# Altium PCB BMS_Slave_8S V0.1.PcbDoc (part 1 of 2)
Units mil, origin at the board's own origin, x right, y up, seen from the top; angles counter-clockwise.
Board outline 2125.98 x 4185.04 mil, 4 copper layers (Top Layer, L2 (GND), L2 (PWR), Bottom Layer), stack 53.912 mil thick; 165 components, 120 nets, 437 pads, 149 vias.
Unrouted connection lines stored in the file: 123.
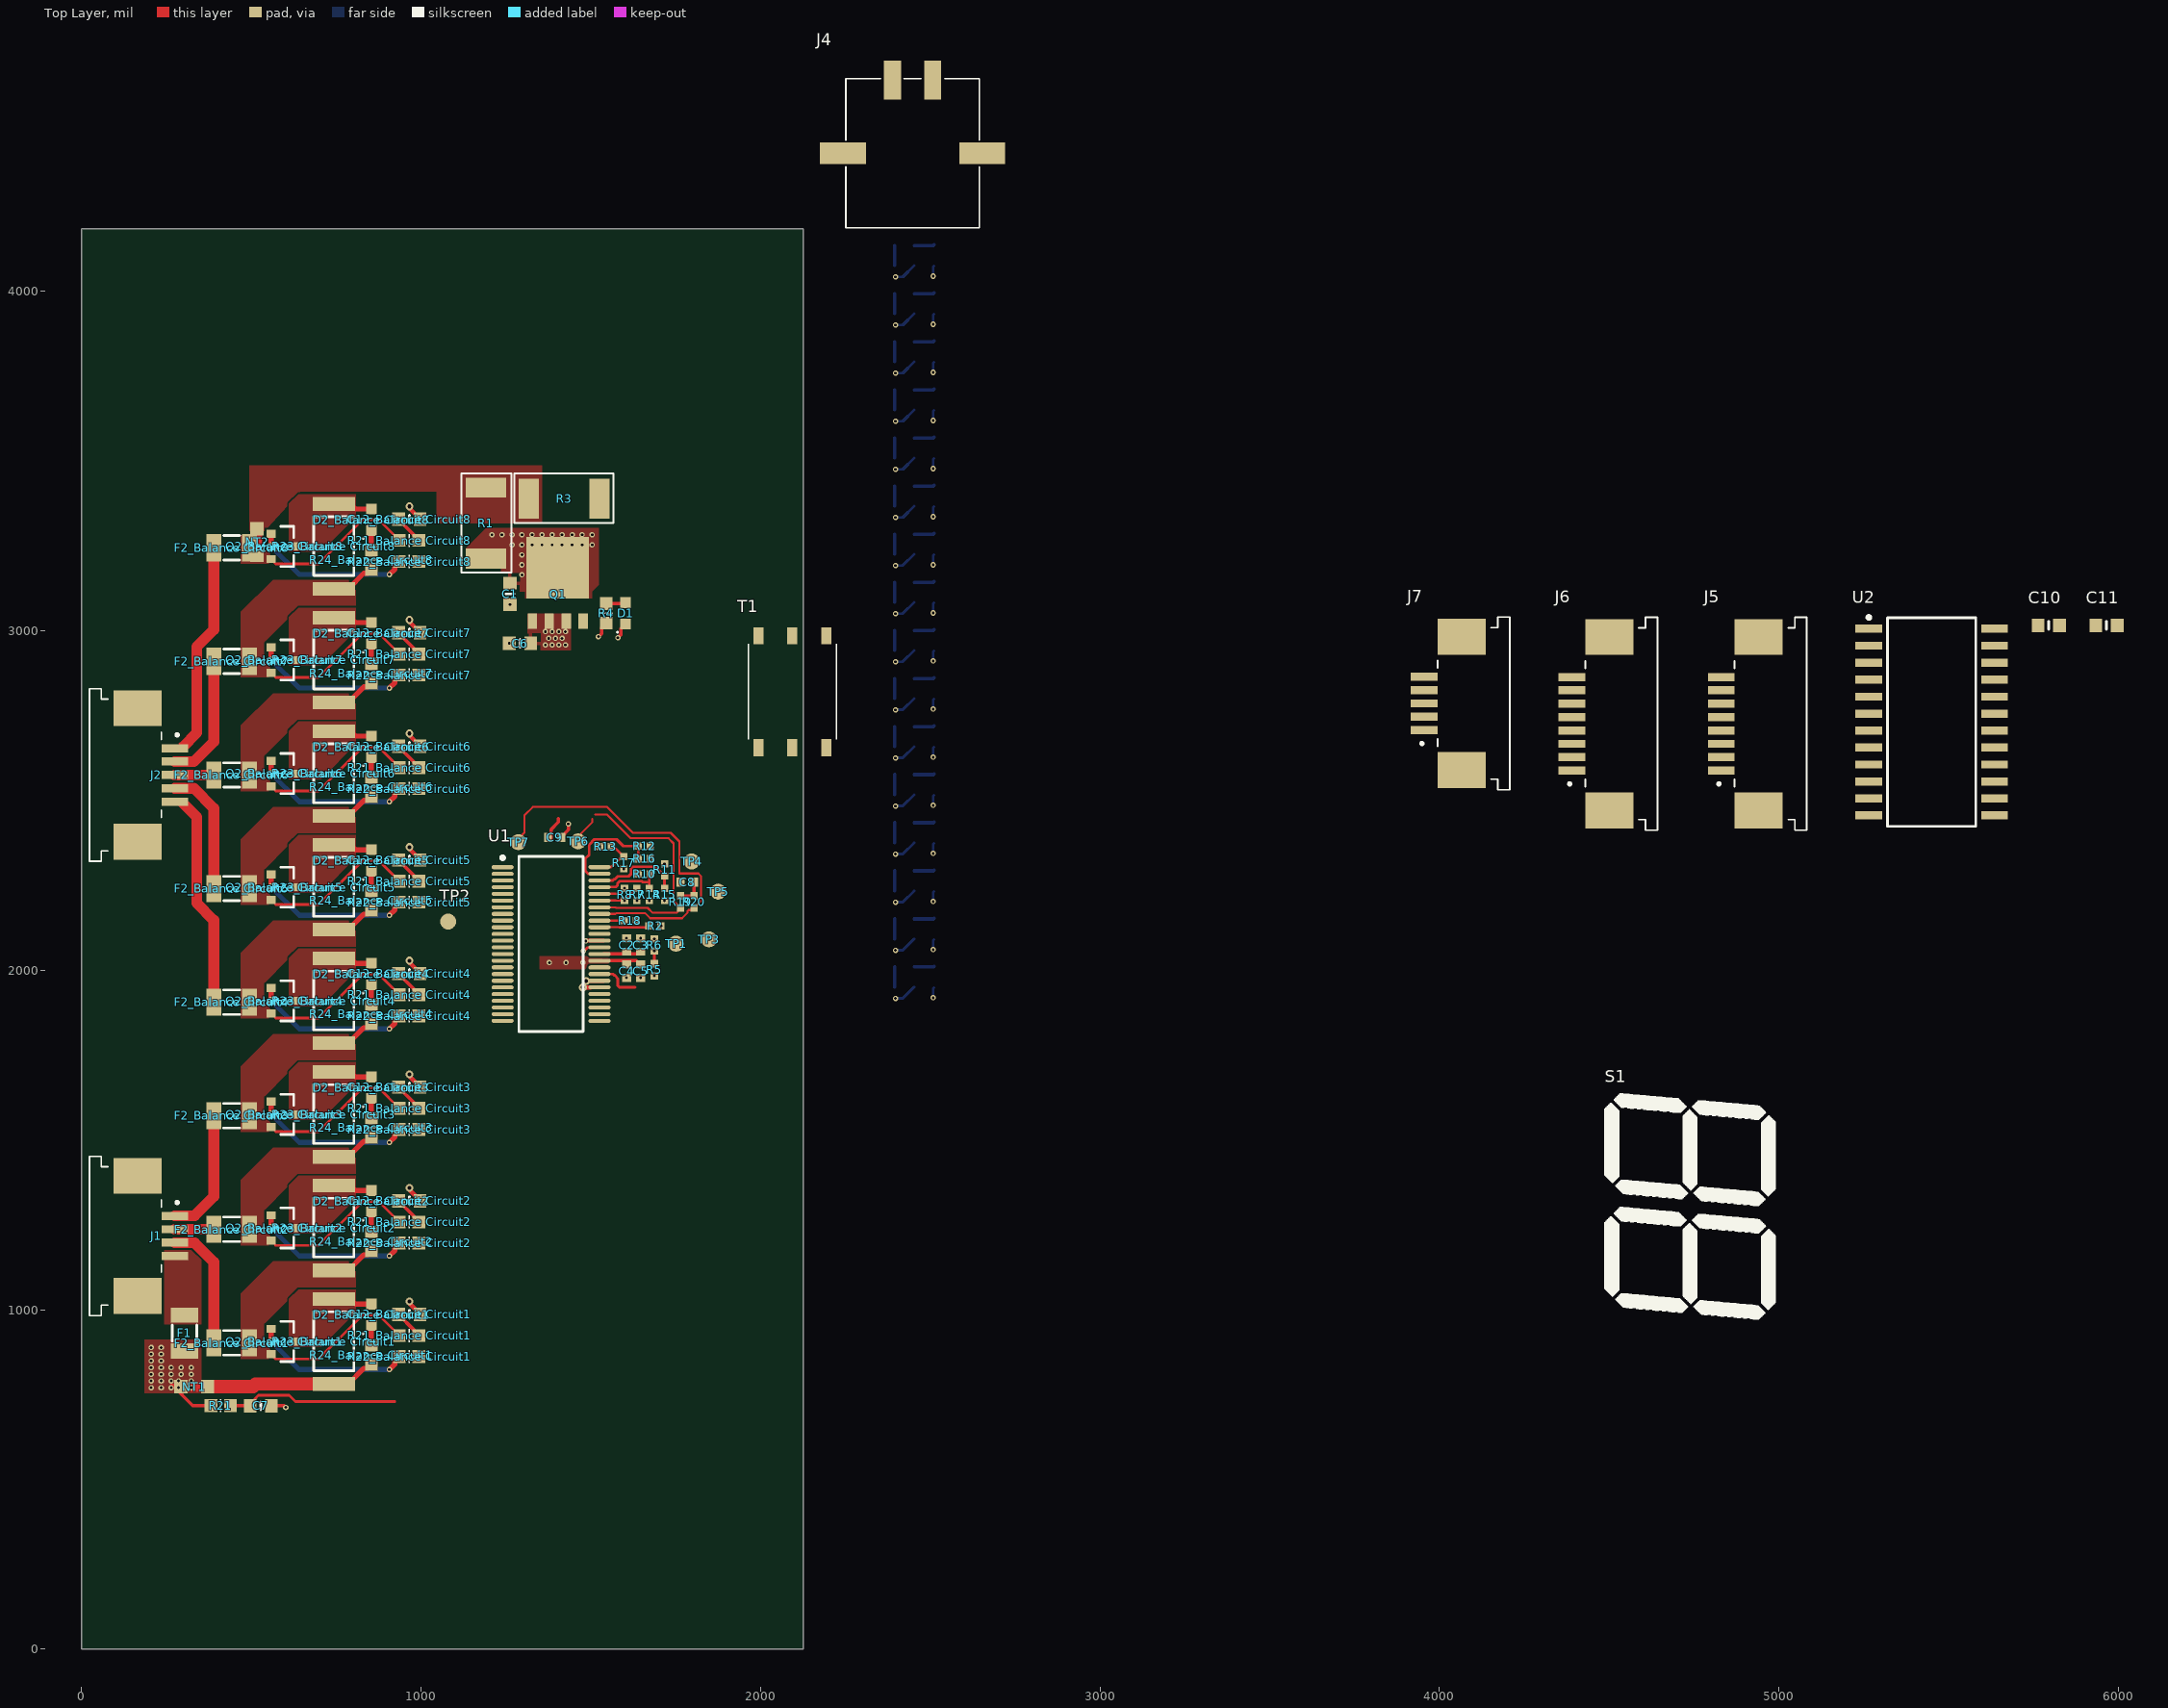
[diagram p0: Top Layer view]
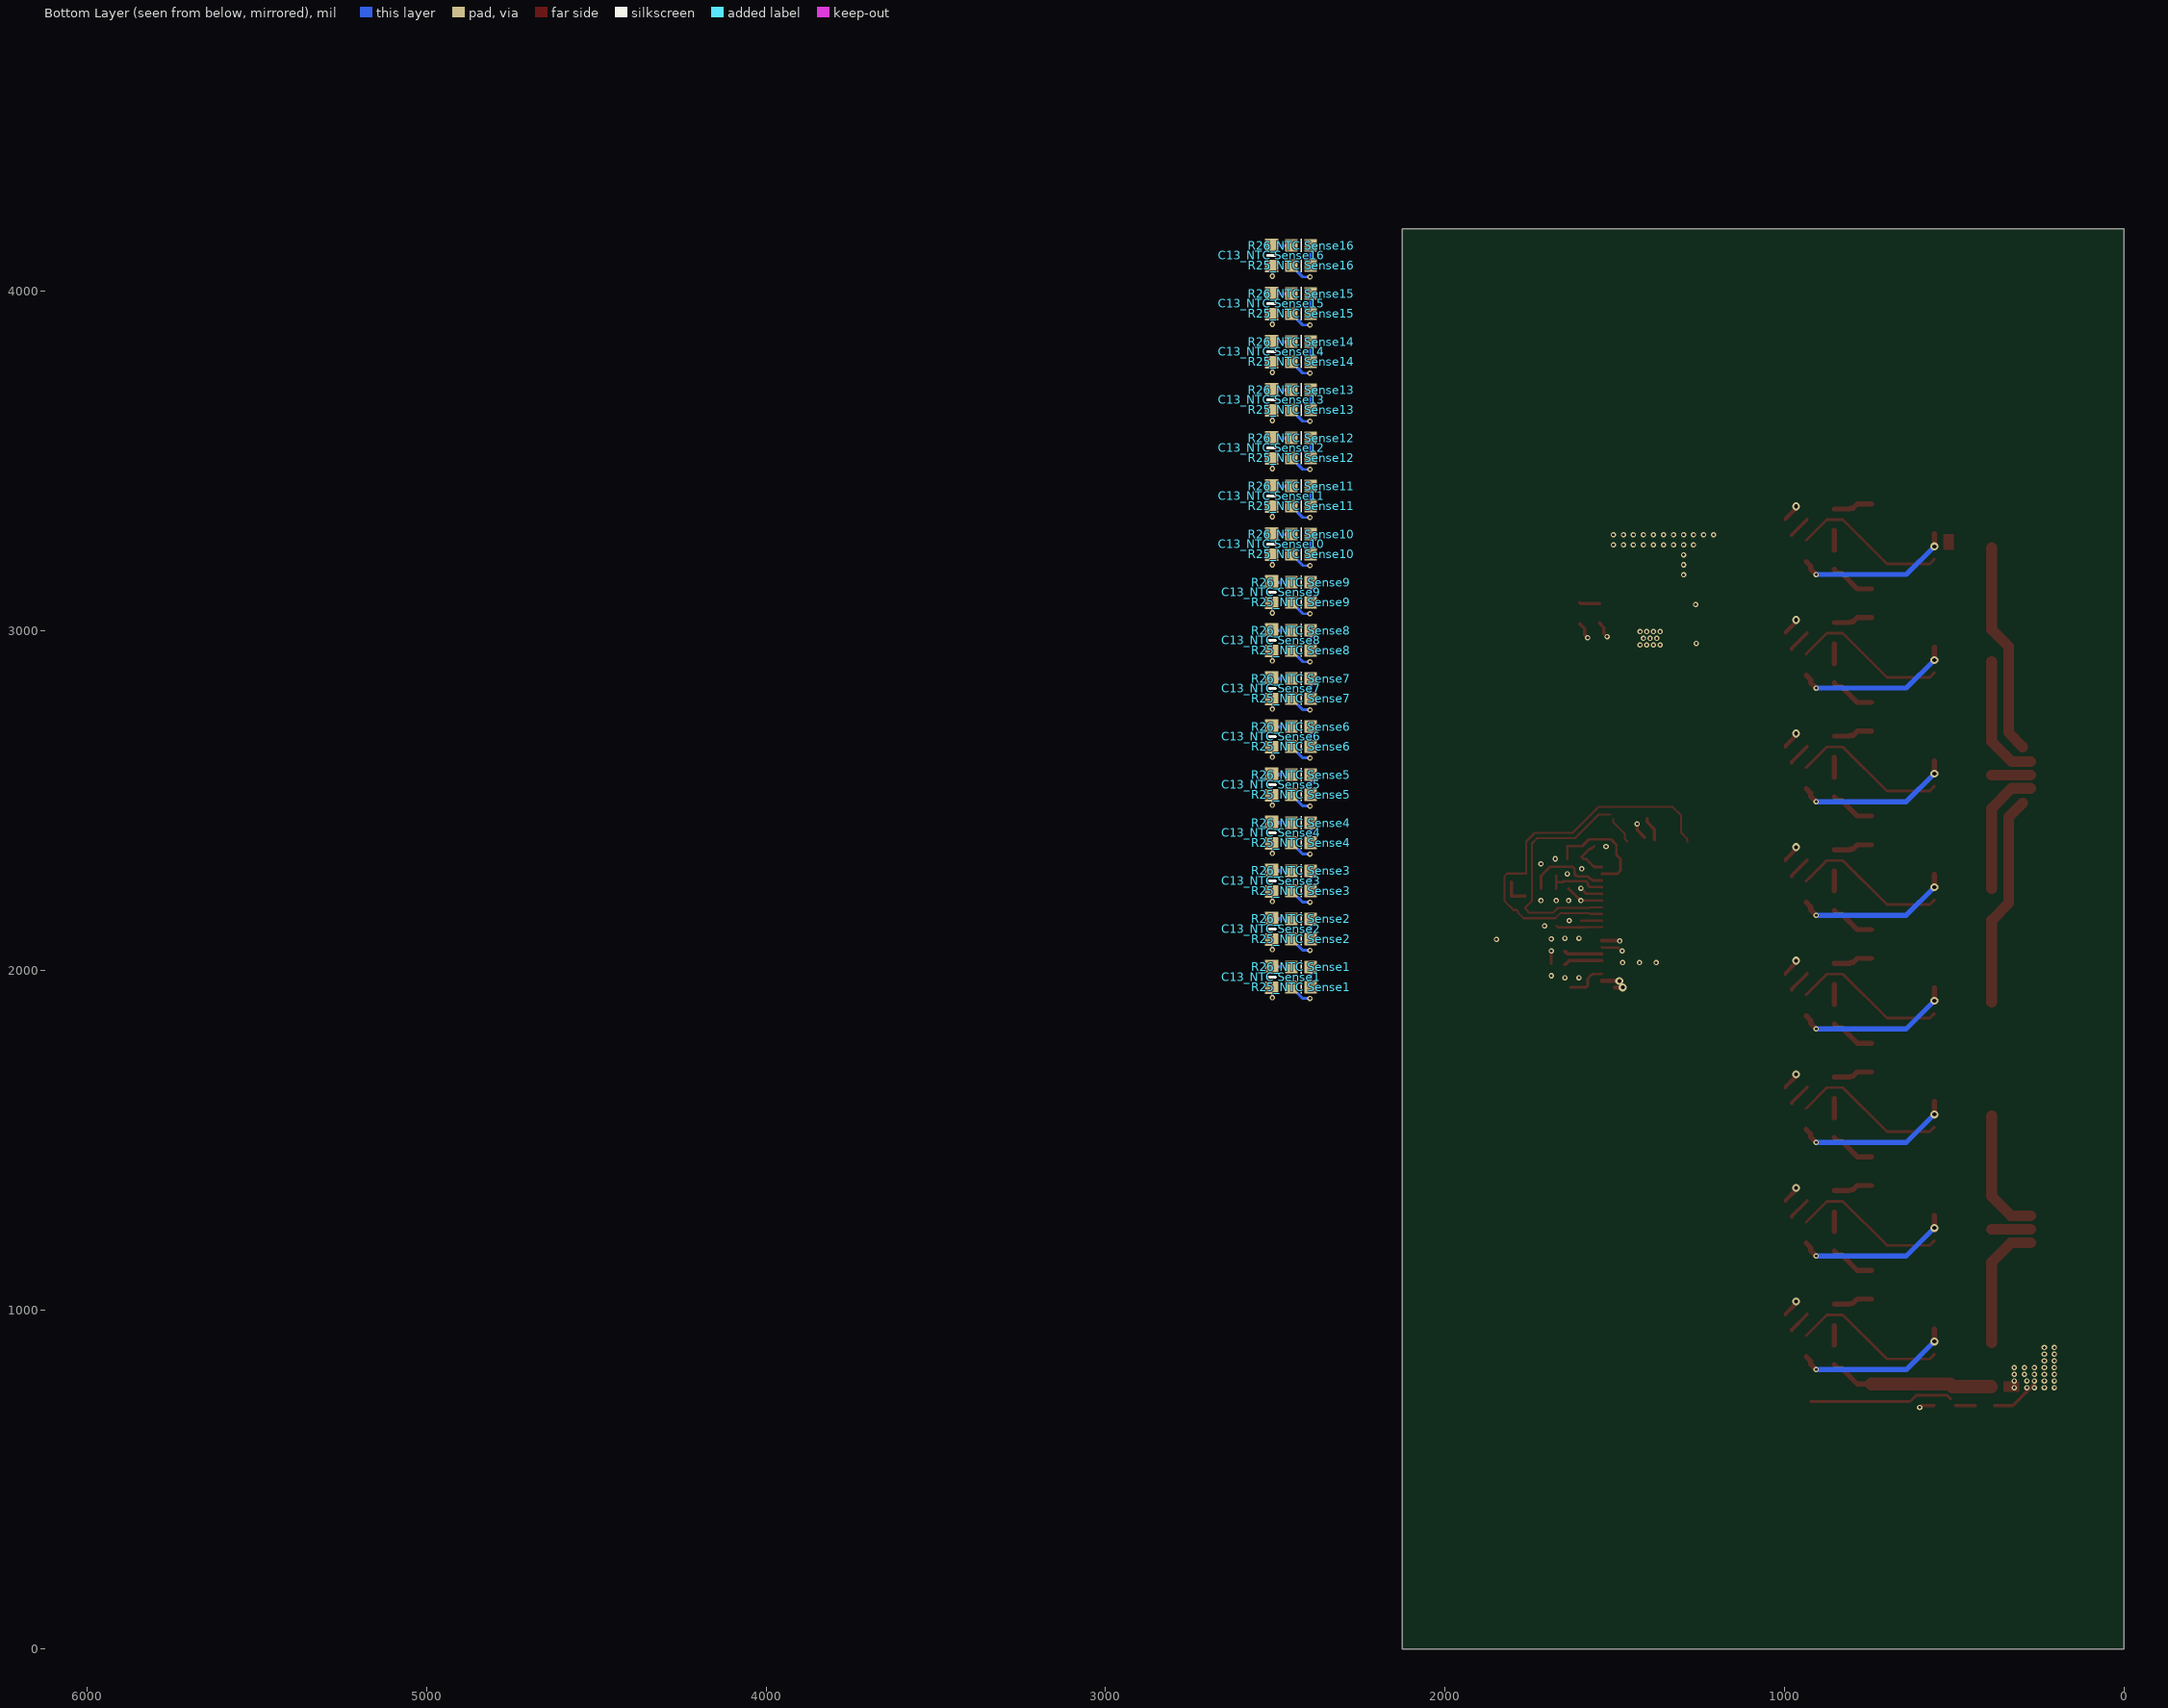
[diagram p1: Bottom Layer view, seen from below]
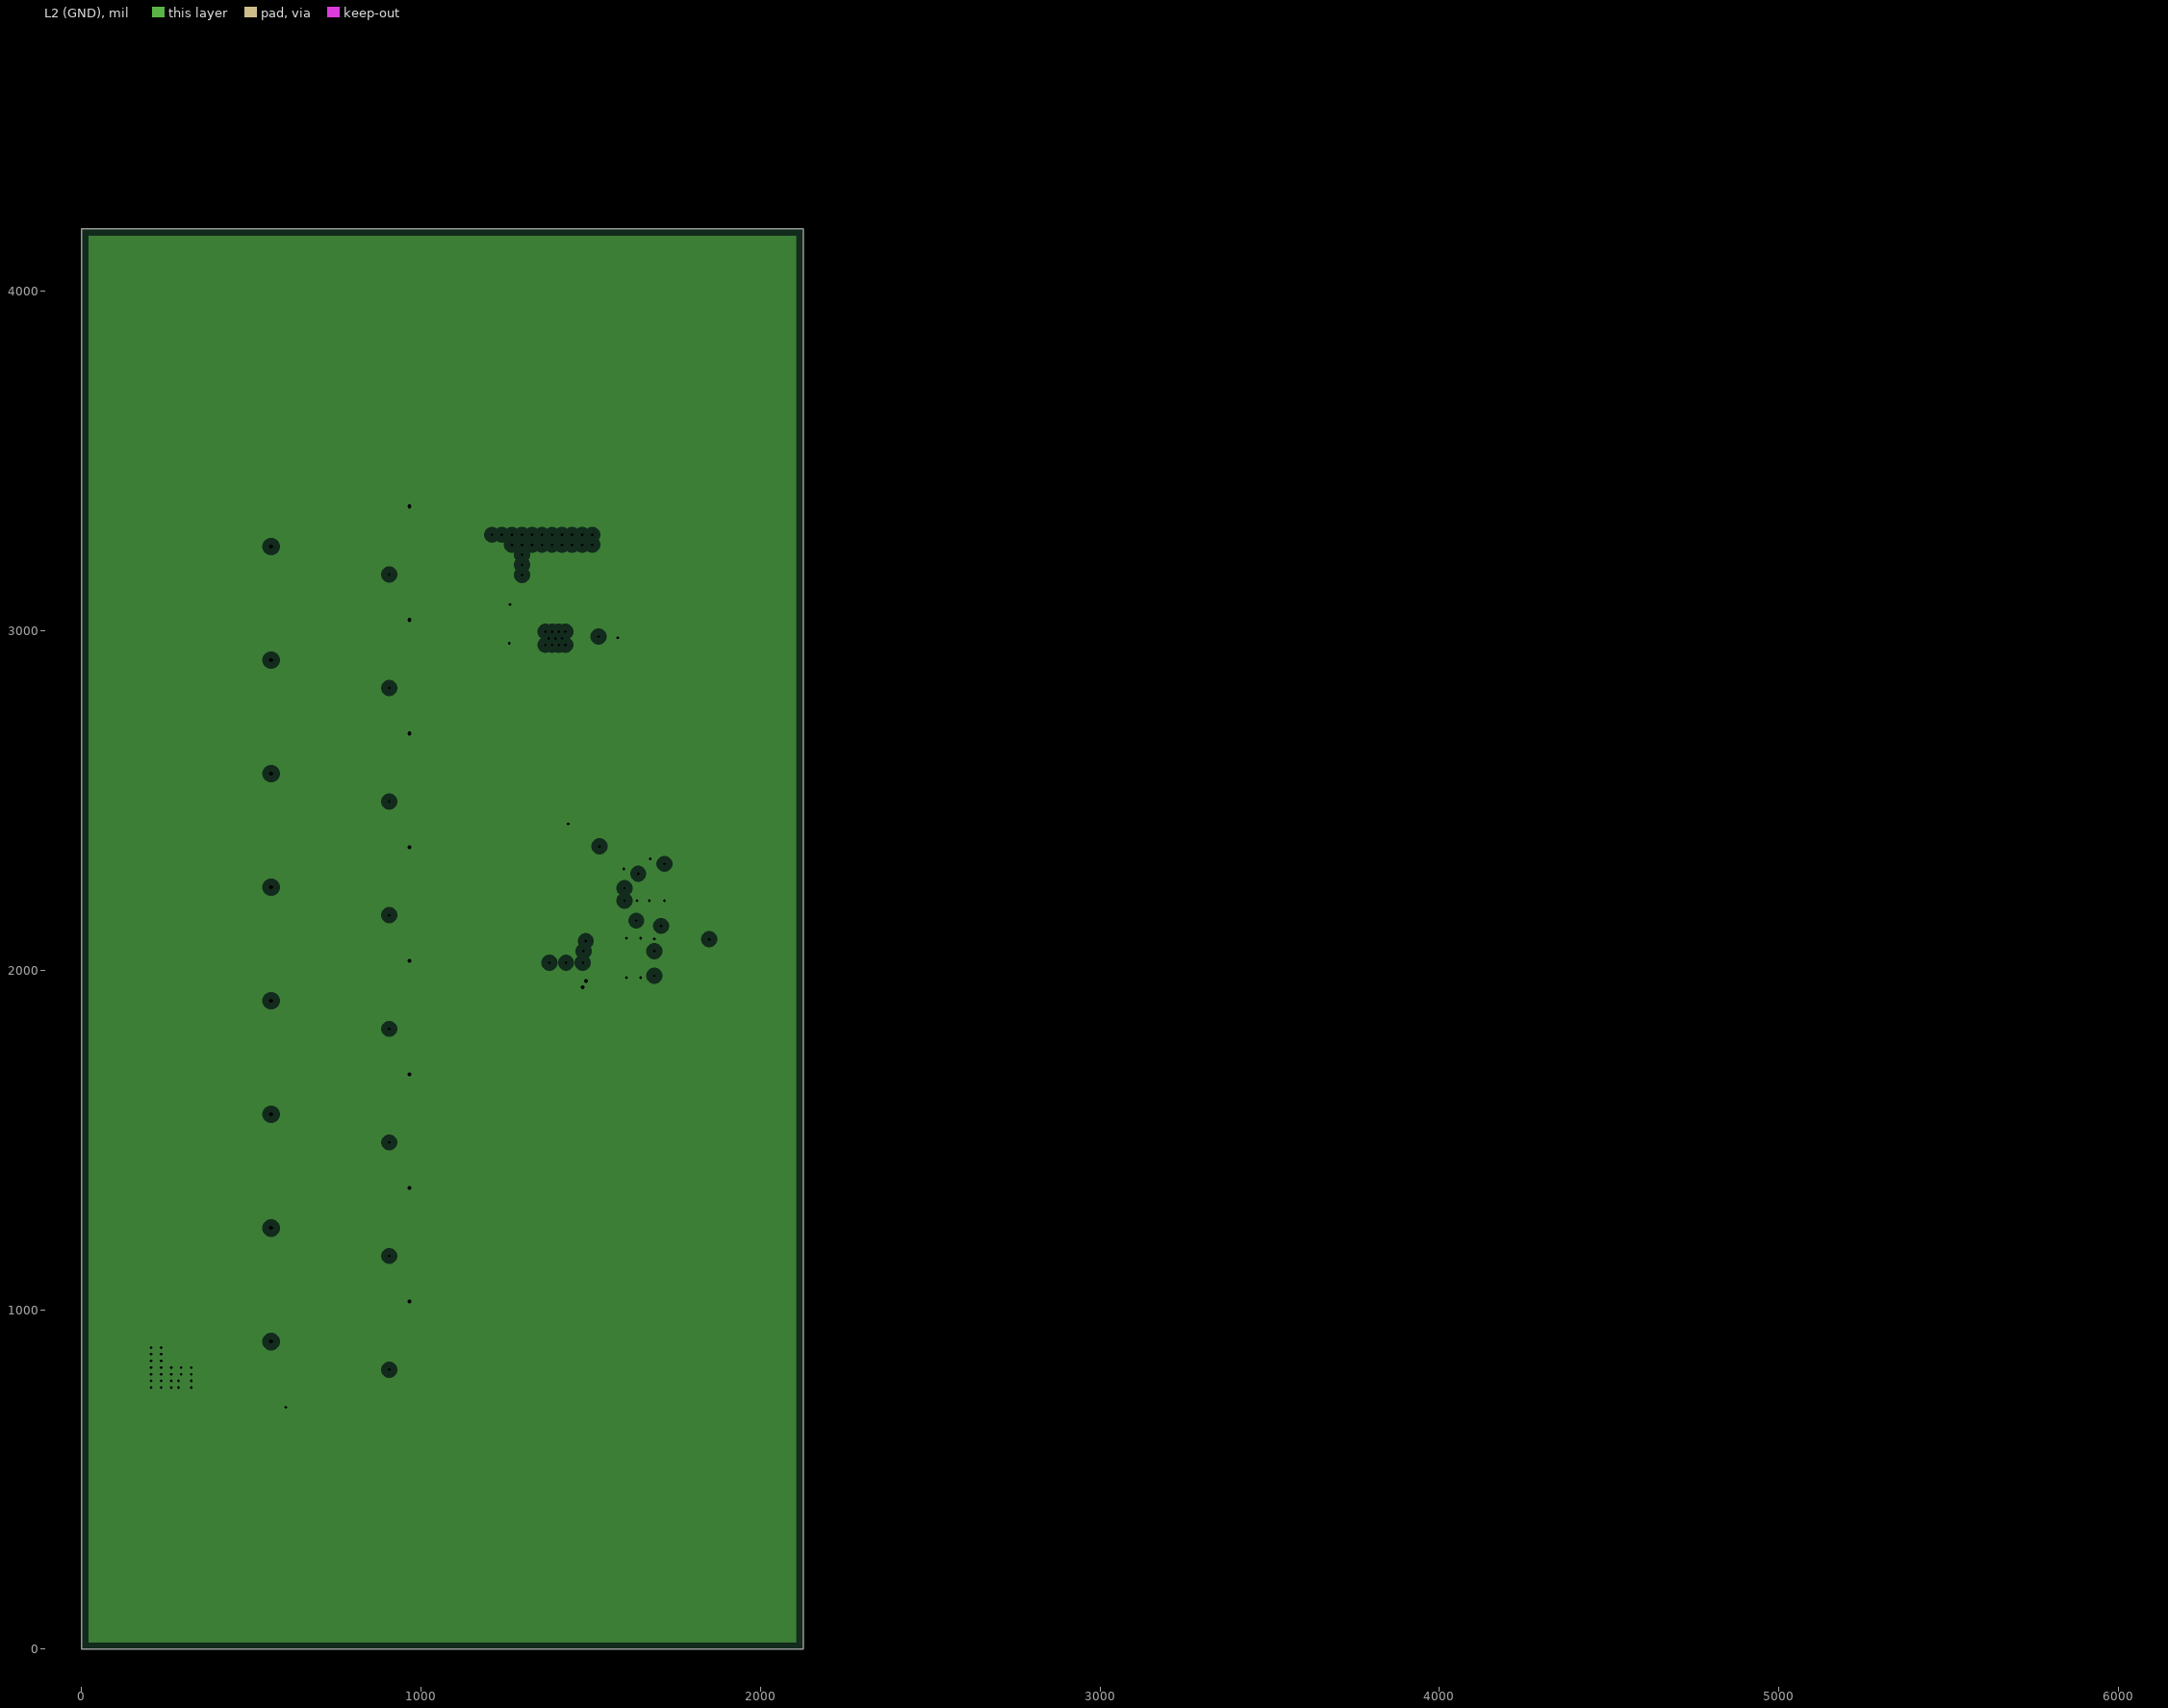
[diagram p2: L2 (GND), clearances drawn from the general rule]
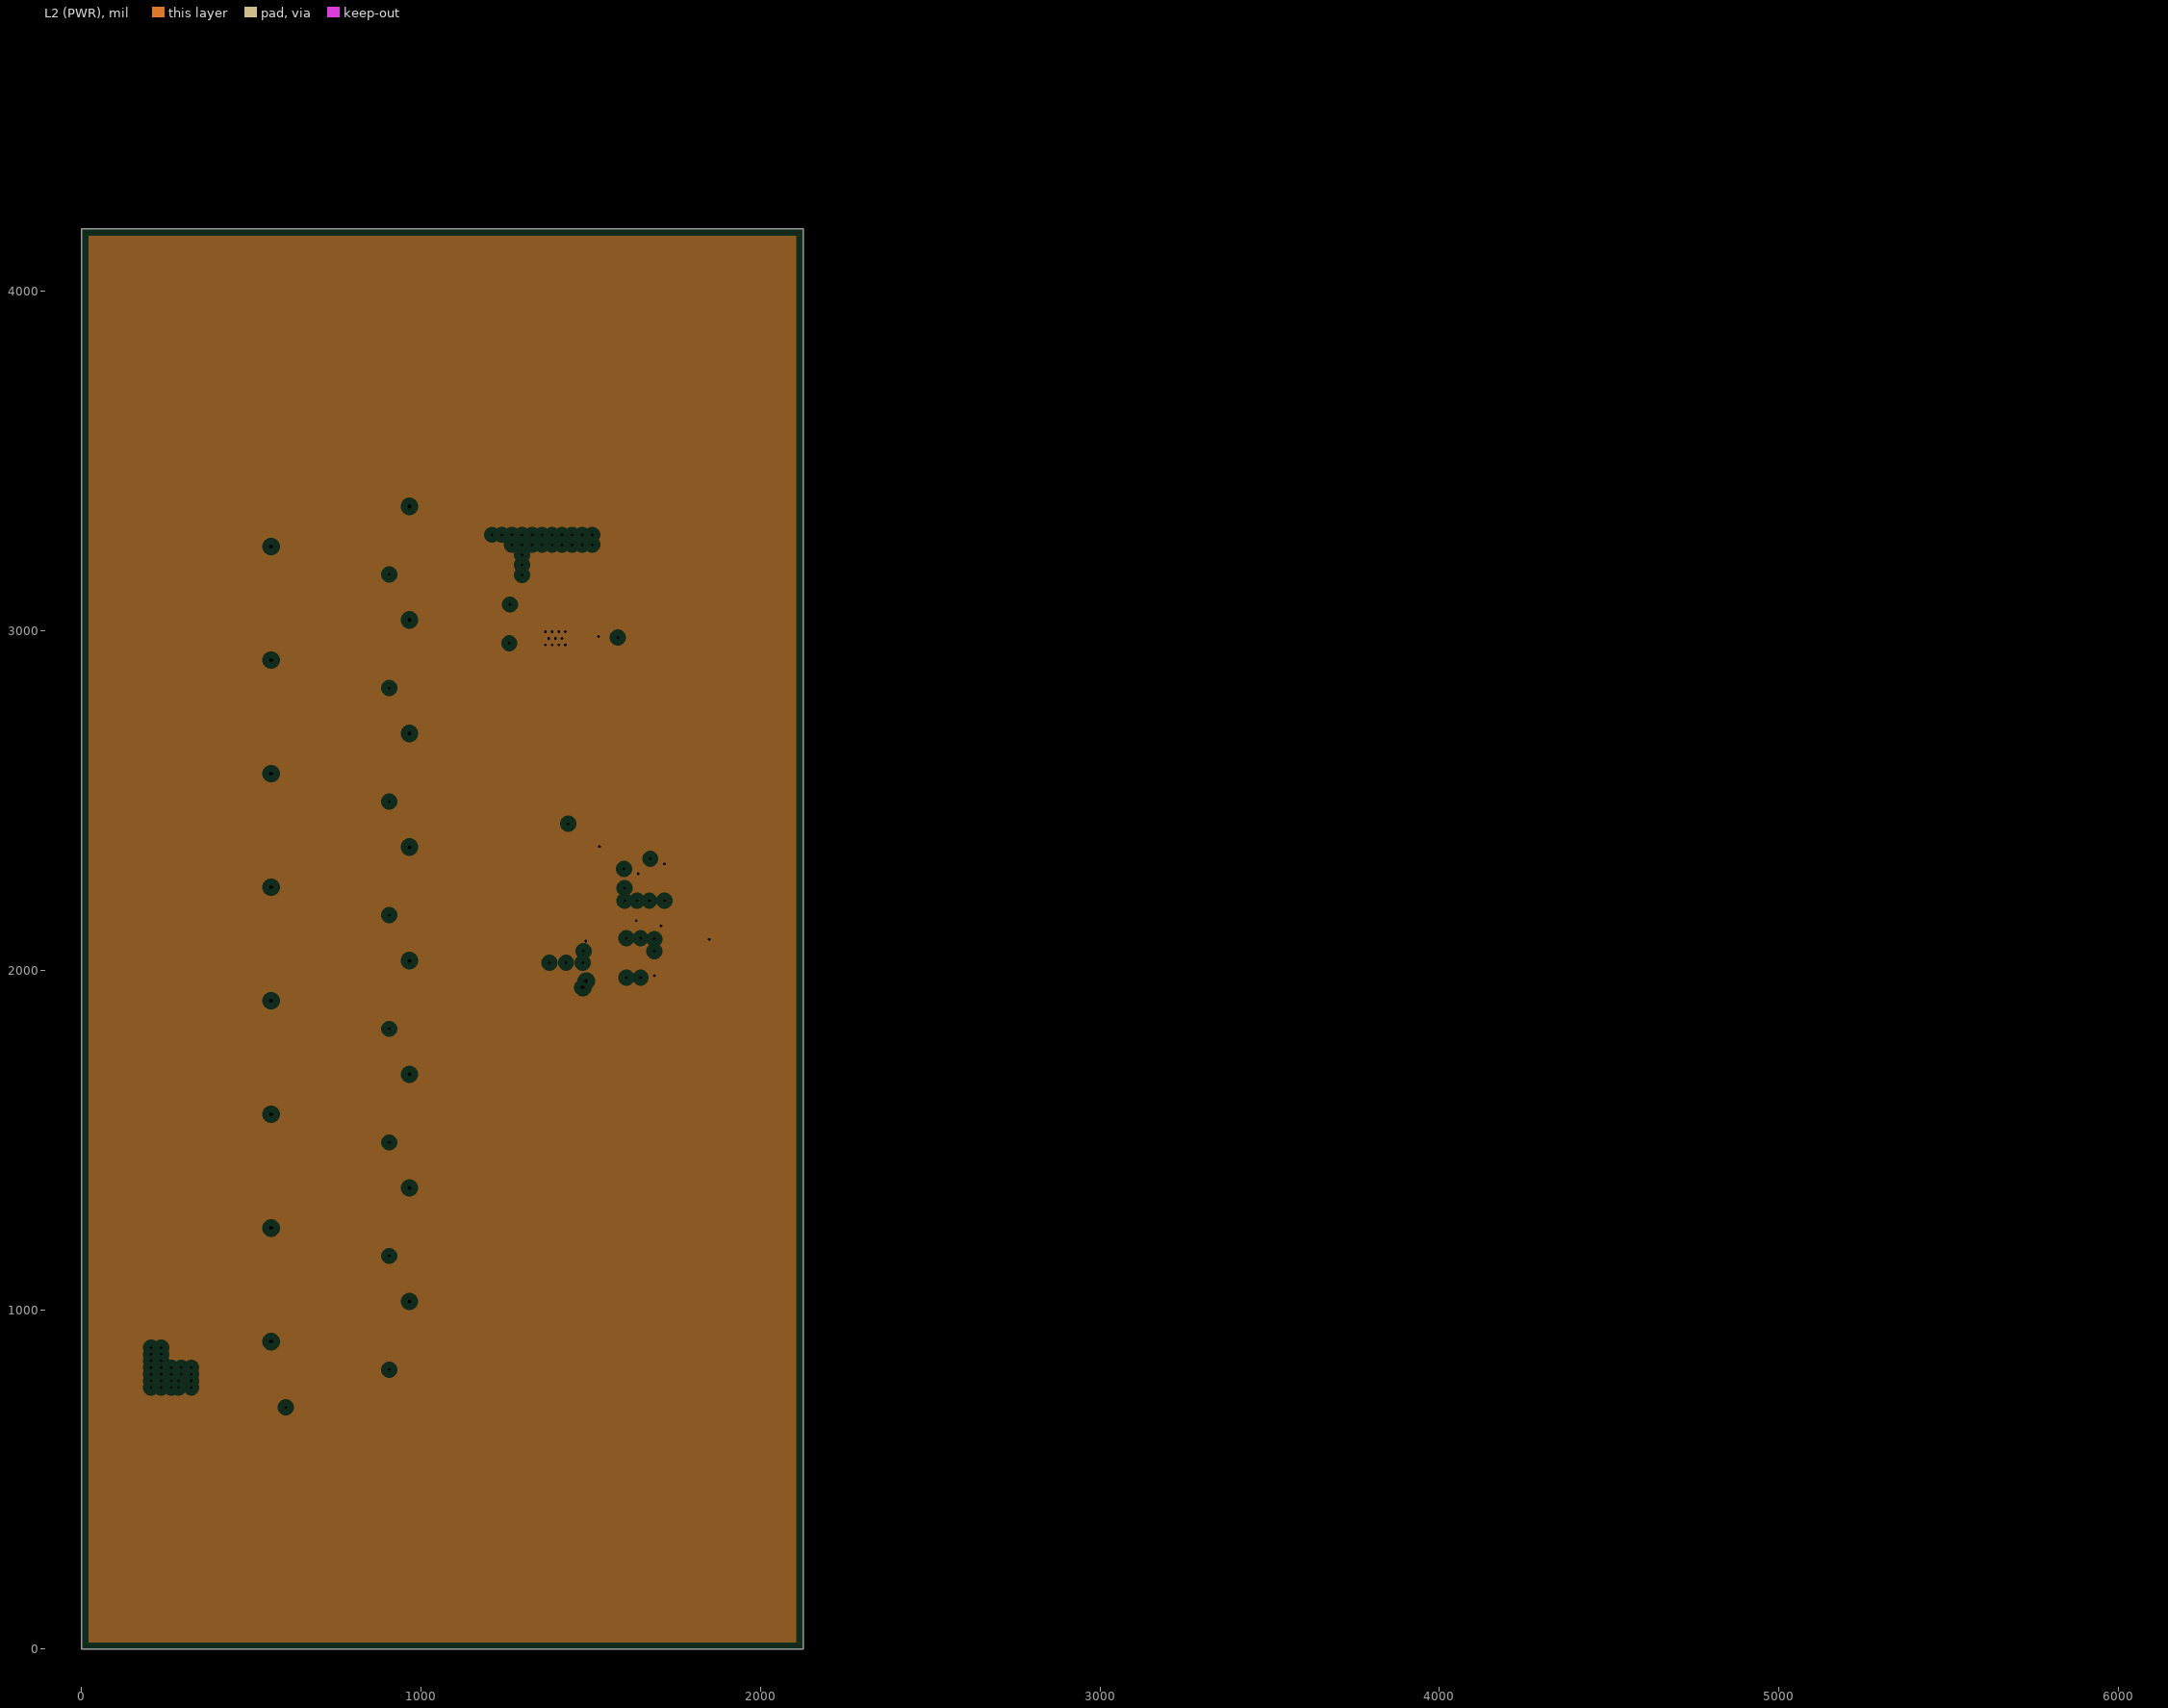
[diagram p3: L2 (PWR), clearances drawn from the general rule]

## Layer stack, top to bottom
Top Solder: solder mask 1, SM-001, Dk 4
Top Layer: signal copper 1.378
Dielectric 1: prepreg 5.1, PP-017, Dk 4.3
Dielectric 2: prepreg 5.1, PP-017, Dk 4.3
L2 (GND): plane copper 1.378, net GND
Dielectric 3: core 28, Core-039, Dk 4.8
L2 (PWR): plane copper 1.378, net 5V0
Dielectric 4: prepreg 5.1, PP-017, Dk 4.3
Dielectric 5: prepreg 5.1, PP-017, Dk 4.3
Bottom Layer: signal copper 1.378
Bottom Solder: solder mask 1, SM-001, Dk 4

## Board outline
0,0 0,4185.04 2125.98,4185.04 2125.98,0

## Design rules (kind name [scope] priority, off if disabled: settings)
BoardOutlineClearance BoardOutlineClearance_Silk [OnLayer('Top Overlay') or OnLayer('Bottom Overlay')] p1: gap=0 ignorepadtopadclearanceinfootprint=FALSE
BoardOutlineClearance [All] p2: gap=19.68 ignorepadtopadclearanceinfootprint=FALSE except(0: Arc-SplitContinuation Track-SplitContinuation SMDPad-SplitContinuation THPad-SplitContinuation Via-SplitContinuation Fill-SplitContinuation Poly-SplitContinuation Region-SplitContinuation Text-SplitContinuation)
Clearance Clearance_NT [HasFootprint('NetTie')] p1: gap=0 ignorepadtopadclearanceinfootprint=FALSE
Clearance [All] p2: gap=6 ignorepadtopadclearanceinfootprint=FALSE
ComponentClearance ComponentClearance-NT [HasFootprint('NetTie')] p1: gap=0 collisioncheckmode=3 verticalgap=0 showdistances=FALSE
ComponentClearance [All] p2: gap=10 collisioncheckmode=3 verticalgap=10 showdistances=FALSE
DiffPairsRouting [InDifferentialPairClass('isoSPI')] p1: maxlimit=10 minlimit=10 mostfreqgap=10 toplayer_minwidth=6 toplayer_maxwidth=6 toplayer_prefwidth=6 bottomlayer_minwidth=6 bottomlayer_maxwidth=6 bottomlayer_prefwidth=6 impedanceprofiledriven=TRUE maxuncoupledlength=1968.5
HoleSize [All] p1: absolutevalues=TRUE maxlimit=248.03 minlimit=7.87 maxpercent=80.000 minpercent=20.000
HoleToHoleClearance [All] p1: gap=11 allowstackedmicrovias=TRUE
MinimumAnnularRing [All] p1: minimumring=6
MinimumSolderMaskSliver [All] p1: minsoldermaskwidth=4
PlaneClearance [All] p1: clearance=20
PlaneConnect [All] p1: planeconnectstyle=Direct reliefexpansion=20 reliefentries=4 reliefconductorwidth=10 reliefairgap=10
PolygonConnect PolygonConnect-Passive [HasFootprint('C-0402') or HasFootprint('R_0402') or HasFootprint('C_0603') or HasFootprint('R-0603')] p1: thpad.connectstyle=Direct thpad.reliefconductorwidth=10 thpad.reliefentries=4 thpad.polygonreliefangle="90 Angle" thpad.airgapwidth=10 smdpad.connectstyle=Relief smdpad.reliefconductorwidth=10 smdpad.reliefentries=4 smdpad.polygonreliefangle="90 Angle" smdpad.airgapwidth=10 via.connectstyle=Direct via.reliefconductorwidth=10 via.reliefentries=4 via.polygonreliefangle="90 Angle" via.airgapwidth=10
PolygonConnect "Power Connect" [All] p2: connectstyle=Direct reliefconductorwidth=10 reliefentries=4 polygonreliefangle="90 Angle" airgapwidth=10
PolygonConnect [All] p3: thpad.connectstyle=Direct thpad.reliefconductorwidth=10 thpad.reliefentries=4 thpad.polygonreliefangle="90 Angle" thpad.airgapwidth=10 smdpad.connectstyle=Relief smdpad.reliefconductorwidth=10 smdpad.reliefentries=4 smdpad.polygonreliefangle="90 Angle" smdpad.airgapwidth=10 via.connectstyle=Direct via.reliefconductorwidth=10 via.reliefentries=4 via.polygonreliefangle="90 Angle" via.airgapwidth=10
RoomDefinition "Balance Circuit2" [InComponentClass('Balance Circuit2')] p1: confinementstyle=ConfineIn formatcopy=TRUE lockcomponents=FALSE outline 341.54,1073.82 1035.43,1073.82 1035.43,1408.46 341.54,1408.46
RoomDefinition "Balance Circuit1" [InComponentClass('Balance Circuit1')] p2: confinementstyle=ConfineIn formatcopy=TRUE lockcomponents=FALSE outline 341.54,739.17 1035.43,739.17 1035.43,1073.82 341.54,1073.82
RoomDefinition "Balance Circuit3" [InComponentClass('Balance Circuit3')] p3: confinementstyle=ConfineIn formatcopy=TRUE lockcomponents=FALSE outline 341.54,1408.46 1035.43,1408.46 1035.43,1743.11 341.54,1743.11
RoomDefinition "Balance Circuit4" [InComponentClass('Balance Circuit4')] p4: confinementstyle=ConfineIn formatcopy=TRUE lockcomponents=FALSE outline 341.54,1743.11 1035.43,1743.11 1035.43,2077.76 341.54,2077.76
RoomDefinition "Balance Circuit5" [InComponentClass('Balance Circuit5')] p5: confinementstyle=ConfineIn formatcopy=TRUE lockcomponents=FALSE outline 341.54,2077.76 1035.43,2077.76 1035.43,2412.4 341.54,2412.4
RoomDefinition "Balance Circuit6" [InComponentClass('Balance Circuit6')] p6: confinementstyle=ConfineIn formatcopy=TRUE lockcomponents=FALSE outline 341.54,2412.4 1035.43,2412.4 1035.43,2747.05 341.54,2747.05
RoomDefinition "Balance Circuit7" [InComponentClass('Balance Circuit7')] p7: confinementstyle=ConfineIn formatcopy=TRUE lockcomponents=FALSE outline 341.54,2747.05 1035.43,2747.05 1035.43,3081.69 341.54,3081.69
RoomDefinition "Balance Circuit8" [InComponentClass('Balance Circuit8')] p8: confinementstyle=ConfineIn formatcopy=TRUE lockcomponents=FALSE outline 341.54,3081.69 1035.43,3081.69 1035.43,3416.34 341.54,3416.34
RoomDefinition "U_Temperature Sensing" [InComponentClass('U_Temperature Sensing')] p9: confinementstyle=ConfineIn formatcopy=TRUE lockcomponents=FALSE outline 3894.68,2391.73 6036.42,2391.73 6036.42,3062.01 3894.68,3062.01
RoomDefinition "NTC Sense16" [InComponentClass('NTC Sense16')] p10: confinementstyle=ConfineIn formatcopy=TRUE lockcomponents=FALSE outline 2355.31,4035.43 2552.17,4035.43 2552.17,4177.17 2355.31,4177.17
RoomDefinition "NTC Sense15" [InComponentClass('NTC Sense15')] p11: confinementstyle=ConfineIn formatcopy=TRUE lockcomponents=FALSE outline 2355.31,3893.7 2552.17,3893.7 2552.17,4035.43 2355.31,4035.43
RoomDefinition "NTC Sense14" [InComponentClass('NTC Sense14')] p12: confinementstyle=ConfineIn formatcopy=TRUE lockcomponents=FALSE outline 2355.31,3751.97 2552.17,3751.97 2552.17,3893.7 2355.31,3893.7
RoomDefinition "NTC Sense13" [InComponentClass('NTC Sense13')] p13: confinementstyle=ConfineIn formatcopy=TRUE lockcomponents=FALSE outline 2355.31,3610.24 2552.17,3610.24 2552.17,3751.97 2355.31,3751.97
RoomDefinition "NTC Sense12" [InComponentClass('NTC Sense12')] p14: confinementstyle=ConfineIn formatcopy=TRUE lockcomponents=FALSE outline 2355.31,3468.5 2552.17,3468.5 2552.17,3610.24 2355.31,3610.24
RoomDefinition "NTC Sense11" [InComponentClass('NTC Sense11')] p15: confinementstyle=ConfineIn formatcopy=TRUE lockcomponents=FALSE outline 2355.31,3326.77 2552.17,3326.77 2552.17,3468.5 2355.31,3468.5
RoomDefinition "NTC Sense10" [InComponentClass('NTC Sense10')] p16: confinementstyle=ConfineIn formatcopy=TRUE lockcomponents=FALSE outline 2355.31,3185.04 2552.17,3185.04 2552.17,3326.77 2355.31,3326.77
RoomDefinition "NTC Sense9" [InComponentClass('NTC Sense9')] p17: confinementstyle=ConfineIn formatcopy=TRUE lockcomponents=FALSE outline 2355.31,3043.31 2552.17,3043.31 2552.17,3185.04 2355.31,3185.04
RoomDefinition "NTC Sense8" [InComponentClass('NTC Sense8')] p18: confinementstyle=ConfineIn formatcopy=TRUE lockcomponents=FALSE outline 2355.31,2901.57 2552.17,2901.57 2552.17,3043.31 2355.31,3043.31
RoomDefinition "NTC Sense7" [InComponentClass('NTC Sense7')] p19: confinementstyle=ConfineIn formatcopy=TRUE lockcomponents=FALSE outline 2355.31,2759.84 2552.17,2759.84 2552.17,2901.57 2355.31,2901.57
RoomDefinition "NTC Sense6" [InComponentClass('NTC Sense6')] p20: confinementstyle=ConfineIn formatcopy=TRUE lockcomponents=FALSE outline 2355.31,2618.11 2552.17,2618.11 2552.17,2759.84 2355.31,2759.84
RoomDefinition "NTC Sense5" [InComponentClass('NTC Sense5')] p21: confinementstyle=ConfineIn formatcopy=TRUE lockcomponents=FALSE outline 2355.31,2476.38 2552.17,2476.38 2552.17,2618.11 2355.31,2618.11
RoomDefinition "NTC Sense4" [InComponentClass('NTC Sense4')] p22: confinementstyle=ConfineIn formatcopy=TRUE lockcomponents=FALSE outline 2355.31,2334.65 2552.17,2334.65 2552.17,2476.38 2355.31,2476.38
RoomDefinition "NTC Sense3" [InComponentClass('NTC Sense3')] p23: confinementstyle=ConfineIn formatcopy=TRUE lockcomponents=FALSE outline 2355.31,2192.91 2552.17,2192.91 2552.17,2334.65 2355.31,2334.65
RoomDefinition "NTC Sense2" [InComponentClass('NTC Sense2')] p24: confinementstyle=ConfineIn formatcopy=TRUE lockcomponents=FALSE outline 2355.31,2051.18 2552.17,2051.18 2552.17,2192.91 2355.31,2192.91
RoomDefinition "NTC Sense1" [InComponentClass('NTC Sense1')] p25: confinementstyle=ConfineIn formatcopy=TRUE lockcomponents=FALSE outline 2355.31,1909.45 2552.17,1909.45 2552.17,2051.18 2355.31,2051.18
RoutingVias [All] p1: holewidth=11.81 width=23.62 viastyle="Through Hole" minholewidth=7.87 minwidth=15.75 maxholewidth=15.75 maxwidth=27.56
ShortCircuit ShortCircuit_NT [HasFootprint('NetTie')] p1: allowed=TRUE
ShortCircuit [All] p2: allowed=FALSE
SilkToSilkClearance [All] p1: silktosilkclearance=0
SilkToSolderMaskClearance [IsPad] p1: minsilkscreentomaskgap=6 clearancetoexposedcopper=TRUE
SolderMaskExpansion SolderMaskExpansion_NT [HasFootprint('NetTie')] p1: expansion=4 istentingtop=TRUE
SolderMaskExpansion SolderMaskExpansion_Via [isvia] p2: expansion=4 istentingtop=TRUE
SolderMaskExpansion [All] p3: expansion=2 istentingtop=FALSE
Width [All] p1: maxlimit=100 minlimit=6 preferedwidth=8
20 further rules are at their usual default settings.

## Classes and differential pairs
channel class "NTC Sense V0.1": "NTC Sense1" "NTC Sense2" "NTC Sense3" "NTC Sense4" "NTC Sense5" "NTC Sense6" "NTC Sense7" "NTC Sense8" "NTC Sense9" "NTC Sense10" "NTC Sense11" "NTC Sense12" "NTC Sense13" "NTC Sense14" "NTC Sense15" "NTC Sense16"
channel class "Balance V0.1": "Balance Circuit1" "Balance Circuit2" "Balance Circuit3" "Balance Circuit4" "Balance Circuit5" "Balance Circuit6" "Balance Circuit7" "Balance Circuit8"
differential pair class isoSPI: isoSPI. PORTA
net class Vc[8..1]: Vc1 Vc2 Vc3 Vc4 Vc5 Vc6 Vc7 Vc8
net class T[12..1]: B2 B3 B4 B5 B6 B7 B8 T8 T9 T10 T11 T12
net class S[8..1]: S1 S2 S3 S4 S5 S6 S7 S8
net class Out[16..1]: Out1 Out2 Out3 Out4 Out5 Out6 Out7 Out8 Out9 Out10 Out11 Out12 Out13 Out14 Out15 Out16
net class NTC[16..1]: NTC1 NTC2 NTC3 NTC4 NTC5 NTC6 NTC7 NTC8 NTC9 NTC10 NTC11 NTC12 NTC13 NTC14 NTC15 NTC16
net class C[8..1]: C1 C2 C3 C4 C5 C6 C7 C8
net class BalanceNetClass: B1 B2 B3 B4 B5 B6 B7 B8 "NetD2_Balance Circuit1_2" "NetD2_Balance Circuit2_2" "NetD2_Balance Circuit3_2" "NetD2_Balance Circuit4_2" "NetD2_Balance Circuit5_2" "NetD2_Balance Circuit6_2" "NetD2_Balance Circuit7_2" "NetD2_Balance Circuit8_2" T8
net class B[12..1]: B1 B2 B3 B4 B5 B6 B7 B8 B9 B10 B11 B12
component class "U_Temperature Sensing": C10 C11 J5 J6 J7 U2
component class U_IsoSPI: C8 C9 J4 R19 R20 T1
component class "U_Cell Monitor": C1 C2 C3 C4 C5 C6 C7 D1 F1 J1 J2 NT1 NT2 Q1 R1 R2 R3 R4 R5 R6 R7 R8 R10 R11 R12 R13 R14 R15 R16 R17 R18 S1 TP1 TP2 TP3 TP4 TP5 TP6 TP7 U1
component class "NTC Sense16": "C13_NTC Sense16" "R25_NTC Sense16" "R26_NTC Sense16"
component class "NTC Sense15": "C13_NTC Sense15" "R25_NTC Sense15" "R26_NTC Sense15"
component class "NTC Sense14": "C13_NTC Sense14" "R25_NTC Sense14" "R26_NTC Sense14"
component class "NTC Sense13": "C13_NTC Sense13" "R25_NTC Sense13" "R26_NTC Sense13"
component class "NTC Sense12": "C13_NTC Sense12" "R25_NTC Sense12" "R26_NTC Sense12"
component class "NTC Sense11": "C13_NTC Sense11" "R25_NTC Sense11" "R26_NTC Sense11"
component class "NTC Sense10": "C13_NTC Sense10" "R25_NTC Sense10" "R26_NTC Sense10"
component class "NTC Sense9": "C13_NTC Sense9" "R25_NTC Sense9" "R26_NTC Sense9"
component class "NTC Sense8": "C13_NTC Sense8" "R25_NTC Sense8" "R26_NTC Sense8"
component class "NTC Sense7": "C13_NTC Sense7" "R25_NTC Sense7" "R26_NTC Sense7"
component class "NTC Sense6": "C13_NTC Sense6" "R25_NTC Sense6" "R26_NTC Sense6"
component class "NTC Sense5": "C13_NTC Sense5" "R25_NTC Sense5" "R26_NTC Sense5"
component class "NTC Sense4": "C13_NTC Sense4" "R25_NTC Sense4" "R26_NTC Sense4"
component class "NTC Sense3": "C13_NTC Sense3" "R25_NTC Sense3" "R26_NTC Sense3"
component class "NTC Sense2": "C13_NTC Sense2" "R25_NTC Sense2" "R26_NTC Sense2"
component class "NTC Sense1": "C13_NTC Sense1" "R25_NTC Sense1" "R26_NTC Sense1"
component class "Balance Circuit8": "C12_Balance Circuit8" "D2_Balance Circuit8" "F2_Balance Circuit8" "Q2_Balance Circuit8" "R21_Balance Circuit8" "R22_Balance Circuit8" "R23_Balance Circuit8" "R24_Balance Circuit8"
component class "Balance Circuit7": "C12_Balance Circuit7" "D2_Balance Circuit7" "F2_Balance Circuit7" "Q2_Balance Circuit7" "R21_Balance Circuit7" "R22_Balance Circuit7" "R23_Balance Circuit7" "R24_Balance Circuit7"
component class "Balance Circuit6": "C12_Balance Circuit6" "D2_Balance Circuit6" "F2_Balance Circuit6" "Q2_Balance Circuit6" "R21_Balance Circuit6" "R22_Balance Circuit6" "R23_Balance Circuit6" "R24_Balance Circuit6"
component class "Balance Circuit5": "C12_Balance Circuit5" "D2_Balance Circuit5" "F2_Balance Circuit5" "Q2_Balance Circuit5" "R21_Balance Circuit5" "R22_Balance Circuit5" "R23_Balance Circuit5" "R24_Balance Circuit5"
component class "Balance Circuit4": "C12_Balance Circuit4" "D2_Balance Circuit4" "F2_Balance Circuit4" "Q2_Balance Circuit4" "R21_Balance Circuit4" "R22_Balance Circuit4" "R23_Balance Circuit4" "R24_Balance Circuit4"
component class "Balance Circuit3": "C12_Balance Circuit3" "D2_Balance Circuit3" "F2_Balance Circuit3" "Q2_Balance Circuit3" "R21_Balance Circuit3" "R22_Balance Circuit3" "R23_Balance Circuit3" "R24_Balance Circuit3"
component class "Balance Circuit2": "C12_Balance Circuit2" "D2_Balance Circuit2" "F2_Balance Circuit2" "Q2_Balance Circuit2" "R21_Balance Circuit2" "R22_Balance Circuit2" "R23_Balance Circuit2" "R24_Balance Circuit2"
component class "Balance Circuit1": "C12_Balance Circuit1" "D2_Balance Circuit1" "F2_Balance Circuit1" "Q2_Balance Circuit1" "R21_Balance Circuit1" "R22_Balance Circuit1" "R23_Balance Circuit1" "R24_Balance Circuit1"
differential pair PORTA: +PORTA_P -PORTA_N
differential pair isoSPI.: +isoSPI._P -isoSPI._N

## Components (designator, comment, footprint, x,y, rotation, side; value= is the part's Value field where it differs from the comment)
C1 "C" C_0603 1261.81,3109.25 r90 top value=100nF
C2 "C" C-0402 1605.32,2074.8 r270 top value=1uF
C3 "C" C-0402 1646.65,2074.8 r270 top value=100nF
C4 "C" C-0402 1605.32,1998.03 r90 top value=100nF
C5 "C" C-0402 1646.65,1998.03 r90 top value=1uF
C6 "C" C_0603 1291.34,2963.58 r0 top value=1uF
C7 "C" C_0603 527.56,717.52 r180 top value=10nF
C8 "C" C-0402 1784.45,2259.84 r0 top value=10nF
C9 "C" C-0402 1393.7,2391.73 r180 top value=10nF
C10 "C" C_0603 5795.39,3016.57 r0 top value=100nF
C11 "C" C_0603 5965.39,3016.57 r0 top value=1uF
"C12_Balance Circuit1" "C" C_0603 965.31,986.73 r180 top value=10nF (schematic designator C12)
"C12_Balance Circuit2" "C" C_0603 965.31,1321.38 r180 top value=10nF (schematic designator C12)
"C12_Balance Circuit3" "C" C_0603 965.31,1656.02 r180 top value=10nF (schematic designator C12)
"C12_Balance Circuit4" "C" C_0603 965.31,1990.67 r180 top value=10nF (schematic designator C12)
"C12_Balance Circuit5" "C" C_0603 965.31,2325.32 r180 top value=10nF (schematic designator C12)
"C12_Balance Circuit6" "C" C_0603 965.31,2659.96 r180 top value=10nF (schematic designator C12)
"C12_Balance Circuit7" "C" C_0603 965.31,2994.61 r180 top value=10nF (schematic designator C12)
"C12_Balance Circuit8" "C" C_0603 965.31,3329.25 r180 top value=10nF (schematic designator C12)
"C13_NTC Sense1" "C" C_0603 2510.83,1980.31 r90 bottom value=10nF (schematic designator C13)
"C13_NTC Sense2" "C" C_0603 2510.83,2122.05 r90 bottom value=10nF (schematic designator C13)
"C13_NTC Sense3" "C" C_0603 2510.83,2263.78 r90 bottom value=10nF (schematic designator C13)
"C13_NTC Sense4" "C" C_0603 2510.83,2405.51 r90 bottom value=10nF (schematic designator C13)
"C13_NTC Sense5" "C" C_0603 2510.83,2547.24 r90 bottom value=10nF (schematic designator C13)
"C13_NTC Sense6" "C" C_0603 2510.83,2688.98 r90 bottom value=10nF (schematic designator C13)
"C13_NTC Sense7" "C" C_0603 2510.83,2830.71 r90 bottom value=10nF (schematic designator C13)
"C13_NTC Sense8" "C" C_0603 2510.83,2972.44 r90 bottom value=10nF (schematic designator C13)
"C13_NTC Sense9" "C" C_0603 2510.83,3114.17 r90 bottom value=10nF (schematic designator C13)
"C13_NTC Sense10" "C" C_0603 2510.83,3255.91 r90 bottom value=10nF (schematic designator C13)
"C13_NTC Sense11" "C" C_0603 2510.83,3397.64 r90 bottom value=10nF (schematic designator C13)
"C13_NTC Sense12" "C" C_0603 2510.83,3539.37 r90 bottom value=10nF (schematic designator C13)
"C13_NTC Sense13" "C" C_0603 2510.83,3681.1 r90 bottom value=10nF (schematic designator C13)
"C13_NTC Sense14" "C" C_0603 2510.83,3822.83 r90 bottom value=10nF (schematic designator C13)
"C13_NTC Sense15" "C" C_0603 2510.83,3964.57 r90 bottom value=10nF (schematic designator C13)
"C13_NTC Sense16" "C" C_0603 2510.83,4106.3 r90 bottom value=10nF (schematic designator C13)
D1 "150060SS55040" "LED (0603)" 1602.36,3052.17 r90 top
"D2_Balance Circuit1" "150060BS55040" "LED (0603)" 853.35,985.24 r90 top (schematic designator D2)
"D2_Balance Circuit2" "150060BS55040" "LED (0603)" 853.35,1319.88 r90 top (schematic designator D2)
"D2_Balance Circuit3" "150060BS55040" "LED (0603)" 853.35,1654.53 r90 top (schematic designator D2)
"D2_Balance Circuit4" "150060BS55040" "LED (0603)" 853.35,1989.17 r90 top (schematic designator D2)
"D2_Balance Circuit5" "150060BS55040" "LED (0603)" 853.35,2323.82 r90 top (schematic designator D2)
"D2_Balance Circuit6" "150060BS55040" "LED (0603)" 853.35,2658.46 r90 top (schematic designator D2)
"D2_Balance Circuit7" "150060BS55040" "LED (0603)" 853.35,2993.11 r90 top (schematic designator D2)
"D2_Balance Circuit8" "150060BS55040" "LED (0603)" 853.35,3327.76 r90 top (schematic designator D2)
F1 "0466.500NR" 0466.500NR 303.15,931.5 r270 top
"F2_Balance Circuit1" "0466.500NR" 0466.500NR 441.93,902.56 r0 top (schematic designator F2)
"F2_Balance Circuit2" "0466.500NR" 0466.500NR 441.93,1237.2 r0 top (schematic designator F2)
"F2_Balance Circuit3" "0466.500NR" 0466.500NR 441.93,1571.85 r0 top (schematic designator F2)
"F2_Balance Circuit4" "0466.500NR" 0466.500NR 441.93,1906.5 r0 top (schematic designator F2)
"F2_Balance Circuit5" "0466.500NR" 0466.500NR 441.93,2241.14 r0 top (schematic designator F2)
"F2_Balance Circuit6" "0466.500NR" 0466.500NR 441.93,2575.79 r0 top (schematic designator F2)
"F2_Balance Circuit7" "0466.500NR" 0466.500NR 441.93,2910.43 r0 top (schematic designator F2)
"F2_Balance Circuit8" "0466.500NR" 0466.500NR 441.93,3245.08 r0 top (schematic designator F2)
J1 "84953-4" 84953-4 274.61,1217.52 r270 top
J2 "84953-5" 84953-5 274.61,2575.79 r270 top
J4 "2-1445057-2" TE_2-1445057-2 2447.83,4407.48 r0 top
J5 "84953-8" 84953-8 4830.39,2726.57 r90 top
J6 "84953-8" 84953-8 4390.39,2726.57 r90 top
J7 "84953-5" 84953-5 3955.39,2786.57 r90 top
NT1 "NetTie" NetTie 292.32,773.62 r0 top net-tie
NT2 "NetTie" NetTie 516.73,3222.44 r90 top net-tie
Q1 "PHPT60603NYX" "LFPAK56 (SOT669)" 1402.56,3107.28 r0 top
"Q2_Balance Circuit1" "NX2301P,215" FP-SOT23-MFG 597.44,906.5 r0 top (schematic designator Q2)
"Q2_Balance Circuit2" "NX2301P,215" FP-SOT23-MFG 597.44,1241.14 r0 top (schematic designator Q2)
"Q2_Balance Circuit3" "NX2301P,215" FP-SOT23-MFG 597.44,1575.79 r0 top (schematic designator Q2)
"Q2_Balance Circuit4" "NX2301P,215" FP-SOT23-MFG 597.44,1910.43 r0 top (schematic designator Q2)
"Q2_Balance Circuit5" "NX2301P,215" FP-SOT23-MFG 597.44,2245.08 r0 top (schematic designator Q2)
"Q2_Balance Circuit6" "NX2301P,215" FP-SOT23-MFG 597.44,2579.72 r0 top (schematic designator Q2)
"Q2_Balance Circuit7" "NX2301P,215" FP-SOT23-MFG 597.44,2914.37 r0 top (schematic designator Q2)
"Q2_Balance Circuit8" "NX2301P,215" FP-SOT23-MFG 597.44,3249.02 r0 top (schematic designator Q2)
R1 "Resistor" R_2010 1190.94,3317.91 r90 top value=100
R2 "Resistor" R_0402 1688.98,2130.91 r0 top value=1M
R3 "Resistor" R_2010 1421.26,3389.76 r180 top value=100
R4 "Resistor" R-0603 1545.28,3052.17 r270 top value=1k
R5 "Resistor" R_0402 1687.01,2001.97 r270 top value=0
R6 "Resistor" R_0402 1687.01,2074.8 r270 top value=0
R7 "Resistor" R_0402 1635.83,2223.42 r270 top value=1.21k
R8 "Resistor" R_0402 1599.41,2223.42 r270 top value=2.8k
R10 "Resistor" R_0402 1657.48,2284.45 r180 top value=0
R11 "Resistor" R_0402 1717.2,2296.26 r90 top value=0
R12 "Resistor" R_0402 1657.48,2366.14 r0 top value=0
R13 "Resistor" R_0402 1543.31,2365.16 r180 top value=0
R14 "Resistor" R_0402 1672.24,2223.42 r90 top value=0
R15 "Resistor" R_0402 1717.2,2223.42 r90 top value=0
R16 "Resistor" R_0402 1657.48,2328.74 r180 top value=0
R17 "Resistor" R_0402 1597.44,2316.93 r90 top value=0
R18 "Resistor" R_0402 1616.14,2146.65 r0 top value=0
R19 "Resistor" R_0402 1764.76,2201.77 r270 top value=51
R20 "Resistor" R_0402 1804.13,2201.77 r270 top value=51
R21 "Resistor" R-0603 409.45,717.92 r0 top value=100 (schematic designator R9)
"R21_Balance Circuit1" "Resistor" R-0603 964.57,924.21 r0 top value=100 (schematic designator R21)
"R21_Balance Circuit2" "Resistor" R-0603 964.57,1258.86 r0 top value=100 (schematic designator R21)
"R21_Balance Circuit3" "Resistor" R-0603 964.57,1593.5 r0 top value=100 (schematic designator R21)
"R21_Balance Circuit4" "Resistor" R-0603 964.57,1928.15 r0 top value=100 (schematic designator R21)
"R21_Balance Circuit5" "Resistor" R-0603 964.57,2262.8 r0 top value=100 (schematic designator R21)
"R21_Balance Circuit6" "Resistor" R-0603 964.57,2597.44 r0 top value=100 (schematic designator R21)
"R21_Balance Circuit7" "Resistor" R-0603 964.57,2932.09 r0 top value=100 (schematic designator R21)
"R21_Balance Circuit8" "Resistor" R-0603 964.57,3266.73 r0 top value=100 (schematic designator R21)
"R22_Balance Circuit1" "Resistor" R-0603 964.57,862.2 r0 top value=3.3k (schematic designator R22)
"R22_Balance Circuit2" "Resistor" R-0603 964.57,1196.85 r0 top value=3.3k (schematic designator R22)
"R22_Balance Circuit3" "Resistor" R-0603 964.57,1531.5 r0 top value=3.3k (schematic designator R22)
"R22_Balance Circuit4" "Resistor" R-0603 964.57,1866.14 r0 top value=3.3k (schematic designator R22)
"R22_Balance Circuit5" "Resistor" R-0603 964.57,2200.79 r0 top value=3.3k (schematic designator R22)
"R22_Balance Circuit6" "Resistor" R-0603 964.57,2535.43 r0 top value=3.3k (schematic designator R22)
"R22_Balance Circuit7" "Resistor" R-0603 964.57,2870.08 r0 top value=3.3k (schematic designator R22)
"R22_Balance Circuit8" "Resistor" R-0603 964.57,3204.72 r0 top value=3.3k (schematic designator R22)
"R23_Balance Circuit1" "Resistor" R_2512 742.87,906.5 r90 top value=R (schematic designator R23)
"R23_Balance Circuit2" "Resistor" R_2512 742.87,1241.14 r90 top value=R (schematic designator R23)
"R23_Balance Circuit3" "Resistor" R_2512 742.87,1575.79 r90 top value=R (schematic designator R23)
"R23_Balance Circuit4" "Resistor" R_2512 742.87,1910.43 r90 top value=R (schematic designator R23)
"R23_Balance Circuit5" "Resistor" R_2512 742.87,2245.08 r90 top value=R (schematic designator R23)
"R23_Balance Circuit6" "Resistor" R_2512 742.87,2579.72 r90 top value=R (schematic designator R23)
"R23_Balance Circuit7" "Resistor" R_2512 742.87,2914.37 r90 top value=R (schematic designator R23)
"R23_Balance Circuit8" "Resistor" R_2512 742.87,3249.02 r90 top value=R (schematic designator R23)
"R24_Balance Circuit1" "Resistor" R-0603 853.35,867.13 r90 top value=1k (schematic designator R24)
"R24_Balance Circuit2" "Resistor" R-0603 853.35,1201.77 r90 top value=1k (schematic designator R24)
"R24_Balance Circuit3" "Resistor" R-0603 853.35,1536.42 r90 top value=1k (schematic designator R24)
"R24_Balance Circuit4" "Resistor" R-0603 853.35,1871.06 r90 top value=1k (schematic designator R24)
"R24_Balance Circuit5" "Resistor" R-0603 853.35,2205.71 r90 top value=1k (schematic designator R24)
"R24_Balance Circuit6" "Resistor" R-0603 853.35,2540.35 r90 top value=1k (schematic designator R24)
"R24_Balance Circuit7" "Resistor" R-0603 853.35,2875 r90 top value=1k (schematic designator R24)
"R24_Balance Circuit8" "Resistor" R-0603 853.35,3209.65 r90 top value=1k (schematic designator R24)
"R25_NTC Sense1" "Resistor" R-0603 2424.21,1950.79 r0 bottom value=10k (schematic designator R25)
"R25_NTC Sense2" "Resistor" R-0603 2424.21,2092.52 r0 bottom value=10k (schematic designator R25)
"R25_NTC Sense3" "Resistor" R-0603 2424.21,2234.25 r0 bottom value=10k (schematic designator R25)
"R25_NTC Sense4" "Resistor" R-0603 2424.21,2375.98 r0 bottom value=10k (schematic designator R25)
"R25_NTC Sense5" "Resistor" R-0603 2424.21,2517.72 r0 bottom value=10k (schematic designator R25)
"R25_NTC Sense6" "Resistor" R-0603 2424.21,2659.45 r0 bottom value=10k (schematic designator R25)
"R25_NTC Sense7" "Resistor" R-0603 2424.21,2801.18 r0 bottom value=10k (schematic designator R25)
"R25_NTC Sense8" "Resistor" R-0603 2424.21,2942.91 r0 bottom value=10k (schematic designator R25)
"R25_NTC Sense9" "Resistor" R-0603 2424.21,3084.65 r0 bottom value=10k (schematic designator R25)
"R25_NTC Sense10" "Resistor" R-0603 2424.21,3226.38 r0 bottom value=10k (schematic designator R25)
"R25_NTC Sense11" "Resistor" R-0603 2424.21,3368.11 r0 bottom value=10k (schematic designator R25)
"R25_NTC Sense12" "Resistor" R-0603 2424.21,3509.84 r0 bottom value=10k (schematic designator R25)
"R25_NTC Sense13" "Resistor" R-0603 2424.21,3651.57 r0 bottom value=10k (schematic designator R25)
"R25_NTC Sense14" "Resistor" R-0603 2424.21,3793.31 r0 bottom value=10k (schematic designator R25)
"R25_NTC Sense15" "Resistor" R-0603 2424.21,3935.04 r0 bottom value=10k (schematic designator R25)
"R25_NTC Sense16" "Resistor" R-0603 2424.21,4076.77 r0 bottom value=10k (schematic designator R25)
"R26_NTC Sense1" "Resistor" R-0603 2424.21,2009.84 r180 bottom value=100 (schematic designator R26)
"R26_NTC Sense2" "Resistor" R-0603 2424.21,2151.57 r180 bottom value=100 (schematic designator R26)
"R26_NTC Sense3" "Resistor" R-0603 2424.21,2293.31 r180 bottom value=100 (schematic designator R26)
"R26_NTC Sense4" "Resistor" R-0603 2424.21,2435.04 r180 bottom value=100 (schematic designator R26)
"R26_NTC Sense5" "Resistor" R-0603 2424.21,2576.77 r180 bottom value=100 (schematic designator R26)
"R26_NTC Sense6" "Resistor" R-0603 2424.21,2718.5 r180 bottom value=100 (schematic designator R26)
"R26_NTC Sense7" "Resistor" R-0603 2424.21,2860.24 r180 bottom value=100 (schematic designator R26)
"R26_NTC Sense8" "Resistor" R-0603 2424.21,3001.97 r180 bottom value=100 (schematic designator R26)
"R26_NTC Sense9" "Resistor" R-0603 2424.21,3143.7 r180 bottom value=100 (schematic designator R26)
"R26_NTC Sense10" "Resistor" R-0603 2424.21,3285.43 r180 bottom value=100 (schematic designator R26)
"R26_NTC Sense11" "Resistor" R-0603 2424.21,3427.17 r180 bottom value=100 (schematic designator R26)
"R26_NTC Sense12" "Resistor" R-0603 2424.21,3568.9 r180 bottom value=100 (schematic designator R26)
"R26_NTC Sense13" "Resistor" R-0603 2424.21,3710.63 r180 bottom value=100 (schematic designator R26)
"R26_NTC Sense14" "Resistor" R-0603 2424.21,3852.36 r180 bottom value=100 (schematic designator R26)
"R26_NTC Sense15" "Resistor" R-0603 2424.21,3994.09 r180 bottom value=100 (schematic designator R26)
"R26_NTC Sense16" "Resistor" R-0603 2424.21,4135.83 r180 bottom value=100 (schematic designator R26)
S1 "2x7Segment" 2x7Segment 4990.39,961.57 r90 top
T1 "SM91502ALE" SM91502ALE 2193.5,2986.22 r180 top
TP1 "VREF1" "Test Point" 1750.98,2078.74 r0 top
TP2 "VREF2" "Test Point" 1079.72,2143.7 r0 top
TP3 "5V0" "Test Point" 1848.43,2091.54 r0 top
TP4 "IBIAS" "Test Point" 1797.24,2320.87 r0 top
TP5 "ICMP" "Test Point" 1875,2232.28 r0 top
TP6 "IPA" "Test Point" 1462.6,2379.92 r0 top
TP7 "IMA" "Test Point" 1286.42,2377.95 r0 top
U1 "LTC6811-2" SSOP50P780X200-48N 1382.87,2077.76 r0 top
U2 "CD74HC4067M96" SOIC127P1030X265-24N 5450.39,2731.57 r0 top

## Footprints (in the part's own frame and the unit in brackets; to place one, negate y for a bottom-side part, rotate by r counter-clockwise, add the part's x,y. Pads: shape width x height; smd on the part's side, far side on the other; paste and mask are expansions set on the pad)
2x7Segment [mil] "2x7Segment"
  silkscreen extent 9,0 676,504
0466.500NR [mm] "500mA Fast Acting Fuse"
  rect 1.14x2.03 smd: 1(-1.335,0) 2(1.335,0)
  silkscreen extent -0.6,-0.92 0.6,0.91, body extent -1.59,-0.76 1.59,0.76, height 0.58
84953-4 [mm] "FPC Connectors, Flex-to-Board, 4 Position, Right Angle, Surface Mount"
  rect 0.61x2 smd: 1(-1.5,0) 2(-0.5,0) 3(0.5,0) 4(1.5,0)
  rect 2.68x3.6 smd: S1(-4.49,-2.8) S2(4.49,-2.8)
  silkscreen extent -5.96,-6.4 5.96,0.27, body extent -5.96,-6.44 5.96,0.11, height 2.59
84953-5 [mm] "FPC Connectors, Flex-to-Board, 5 Position, Right Angle, Surface Mount"
  rect 0.61x2 smd: 1(-2,0) 2(-1,0) 3(0,0) 4(1,0) 5(2,0)
  rect 2.68x3.6 smd: S1(-4.99,-2.8) S2(4.99,-2.8)
  silkscreen extent -6.46,-6.4 6.46,0.27, body extent -6.47,-6.44 6.47,0.11, height 2.59
84953-8 [mm] "FPC Connectors, 8POS"
  rect 0.61x2 smd: 1(-3.5,0) 2(-2.5,0) 3(-1.5,0) 4(-0.5,0) 5(0.5,0) 6(1.5,0) 7(2.5,0) 8(3.5,0)
  rect 2.68x3.6 smd: S1(-6.49,-2.8) S2(6.49,-2.8)
  silkscreen extent -7.96,-6.4 7.96,0.27, body extent -7.96,-6.44 7.97,0.11, height 2.59
C-0402 [mm] "0402 Capacitor"
  rect 0.6x0.7 smd: 1(-0.5,0) 2(0.5,0)
  body extent -0.55,-0.3 0.55,0.3, height 0.5
C_0603 [mm] "0603 Capacitor"
  rect 0.95x1 smd: 1(-0.8,0) 2(0.8,0)
  silkscreen extent 0,-0.3 0,0.3, body extent -0.87,-0.48 0.88,0.48, height 0.9
FP-SOT23-MFG [mm]
  rect 0.7x0.6 smd paste-1000 mask+0: 1(-1,0.95) 2(-1,-0.95) 3(1,0)
  silkscreen extent -0.7,-1.5 0.7,1.5, body extent -1.5,-1.65 1.5,1.65, height 0.25
"LED (0603)" [mm]
  rect 0.8x0.8 smd: 1(-0.8,0) 2(0.8,0)
  silkscreen extent -1.46,0.56 -1.36,0.66, body extent -0.8,-0.4 0.8,0.4, height 0.41
"LFPAK56 (SOT669)" [mm] "4 Lead SOT"
  rect 0.7x1.15 smd: 1(-1.905,-2) 2(-0.635,-2) 3(0.635,-2) 4(1.905,-2)
  rect 4.7x4.6 smd: 5(0,2)
  body extent -2.5,-2.47 2.5,4.3, height 1.21
NetTie [mm] "NetTie"
  rect 1x1 smd: 1(0,0) 2(2,0)
  Top Layer region: 0.4,-0.4 1.6,-0.4 1.6,0.4 0.4,0.4
R-0603 [mm] "0603 Chip Resistor"
  rect 0.95x0.95 smd: 1(-0.725,0) 2(0.725,0)
  silkscreen extent 0,-0.48 0,0.48, body extent -0.85,-0.48 0.85,0.48, height 0.55
R_0402 [mm] "Chip Resistor, 2-Leads, Body 1.00x0.50mm, IPC Medium Density"
  rect 0.55x0.55 smd: 1(-0.45,0) 2(0.45,0)
  body extent -0.52,-0.27 0.53,0.28, height 0.32
R_2010 [mm]
  rect 1.5x3 smd: 1(-2.65,0) 2(2.65,0)
  silkscreen extent -3.7,-1.9 3.73,1.83, body extent -2.5,-1.25 2.5,1.25, height 0.61
R_2512 [mm] "2512 Resistor"
  rect 1.02x3.18 smd: 1(-3.175,0) 2(3.175,0)
  silkscreen extent -2.17,-1.5 2.22,1.5, body extent -3.15,-1.63 3.2,1.63, height 0.62
SM91502ALE [mm]
  rect 0.76x1.27 smd: 1(0,0) 2(2.54,0) 3(5.08,0) 4(5.08,8.38) 5(2.54,8.38) 6(0,8.38)
  round 0.3 on Top Overlay: ""(-1.15,0.725)
  silkscreen extent -0.75,0.63 5.83,7.75, body extent -1.28,-0.22 6.34,8.67, height 5.73
SOIC127P1030X265-24N [mm] "SOIC, 24-Leads, Body 15.40x7.50mm, Pitch 1.27mm, IPC Medium Density"
  rect 2x0.6 smd: 1(-4.7,6.985) 2(-4.7,5.715) 3(-4.7,4.445) 4(-4.7,3.175) 5(-4.7,1.905) 6(-4.7,0.635) 7(-4.7,-0.635) 8(-4.7,-1.905) 9(-4.7,-3.175) 10(-4.7,-4.445) 11(-4.7,-5.715) 12(-4.7,-6.985) 13(4.7,-6.985) 14(4.7,-5.715) 15(4.7,-4.445) 16(4.7,-3.175) 17(4.7,-1.905) 18(4.7,-0.635) 19(4.7,0.635) 20(4.7,1.905) 21(4.7,3.175) 22(4.7,4.445) 23(4.7,5.715) 24(4.7,6.985)
  silkscreen extent -4.82,-7.8 3.3,7.96, body extent -5.15,-7.8 5.15,7.8, height 2.65
SSOP50P780X200-48N [mm] "SSOP, 48-Leads, Body 12.80x5.30mm, Pitch 0.50mm, IPC Medium Density"
  oval 1.65x0.3 smd: 1(-3.625,5.75) 2(-3.625,5.25) 3(-3.625,4.75) 4(-3.625,4.25) 5(-3.625,3.75) 6(-3.625,3.25) 7(-3.625,2.75) 8(-3.625,2.25) 9(-3.625,1.75) 10(-3.625,1.25) 11(-3.625,0.75) 12(-3.625,0.25) 13(-3.625,-0.25) 14(-3.625,-0.75) 15(-3.625,-1.25) 16(-3.625,-1.75) 17(-3.625,-2.25) 18(-3.625,-2.75) 19(-3.625,-3.25) 20(-3.625,-3.75) 21(-3.625,-4.25) 22(-3.625,-4.75) 23(-3.625,-5.25) 24(-3.625,-5.75) 25(3.625,-5.75) 26(3.625,-5.25) 27(3.625,-4.75) 28(3.625,-4.25) 29(3.625,-3.75) 30(3.625,-3.25) 31(3.625,-2.75) 32(3.625,-2.25) 33(3.625,-1.75) 34(3.625,-1.25) 35(3.625,-0.75) 36(3.625,-0.25) 37(3.625,0.25) 38(3.625,0.75) 39(3.625,1.25) 40(3.625,1.75) 41(3.625,2.25) 42(3.625,2.75) 43(3.625,3.25) 44(3.625,3.75) 45(3.625,4.25) 46(3.625,4.75) 47(3.625,5.25) 48(3.625,5.75)
  silkscreen extent -3.75,-6.55 2.4,6.57, body extent -3.9,-6.55 3.9,6.55, height 2
TE_2-1445057-2 [mm]
  rect 1.27x2.92 smd: 1(1.5,5.48) 2(-1.5,5.48)
  rect 3.43x1.65 smd: P1(5.205,0) P2(-5.205,0)
  silkscreen extent -5,-5.58 5,5.58, body extent -6.62,-4.57 6.62,6.59, height 5.68
"Test Point" [mm] "1.2mm Test point"
  round 1.2 smd: 1(0,0)